# Altium PCB PCB2.PcbDoc
Units mm, origin at the board's own origin, x right, y up, seen from the top; angles counter-clockwise.
Board outline 127.67 x 40.34 mm, 2 copper layers (Top Layer, Bottom Layer); 5 components, 2 nets, 12 pads, 289 vias.
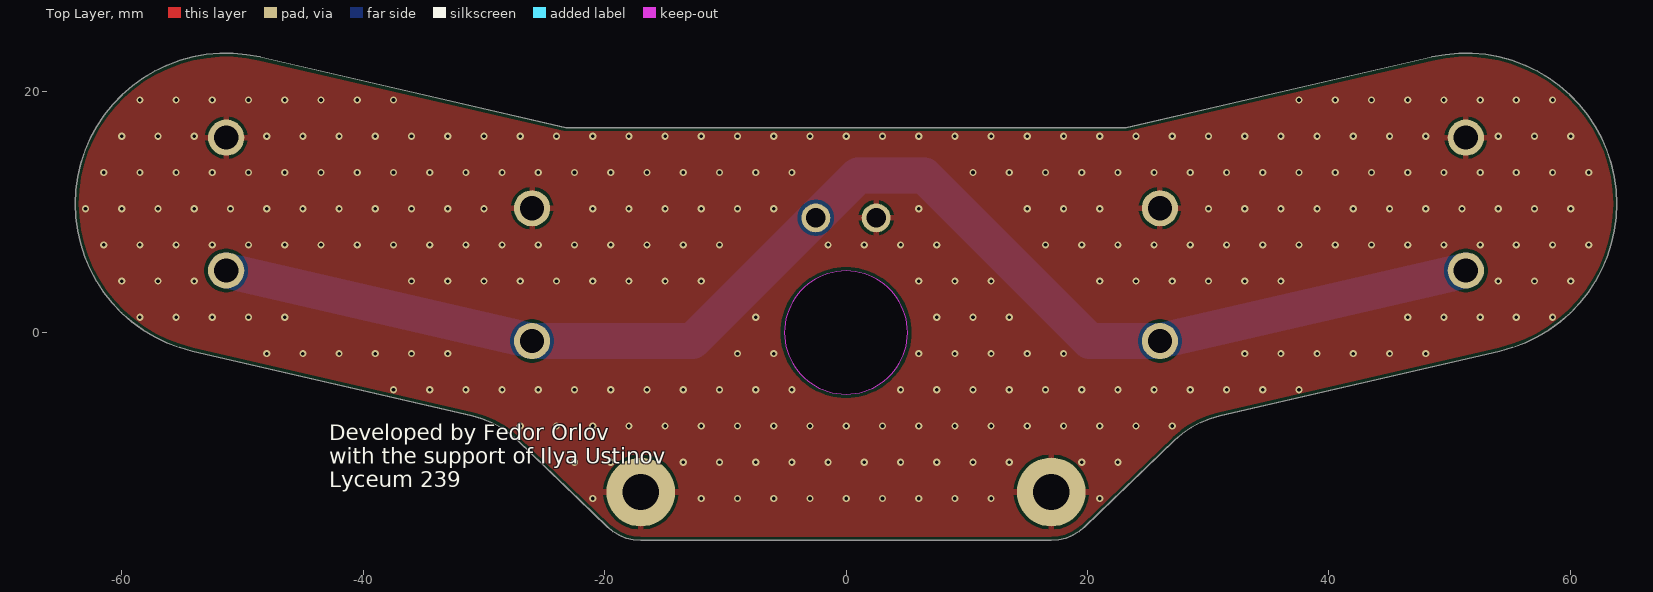
[diagram p0: Top Layer view]
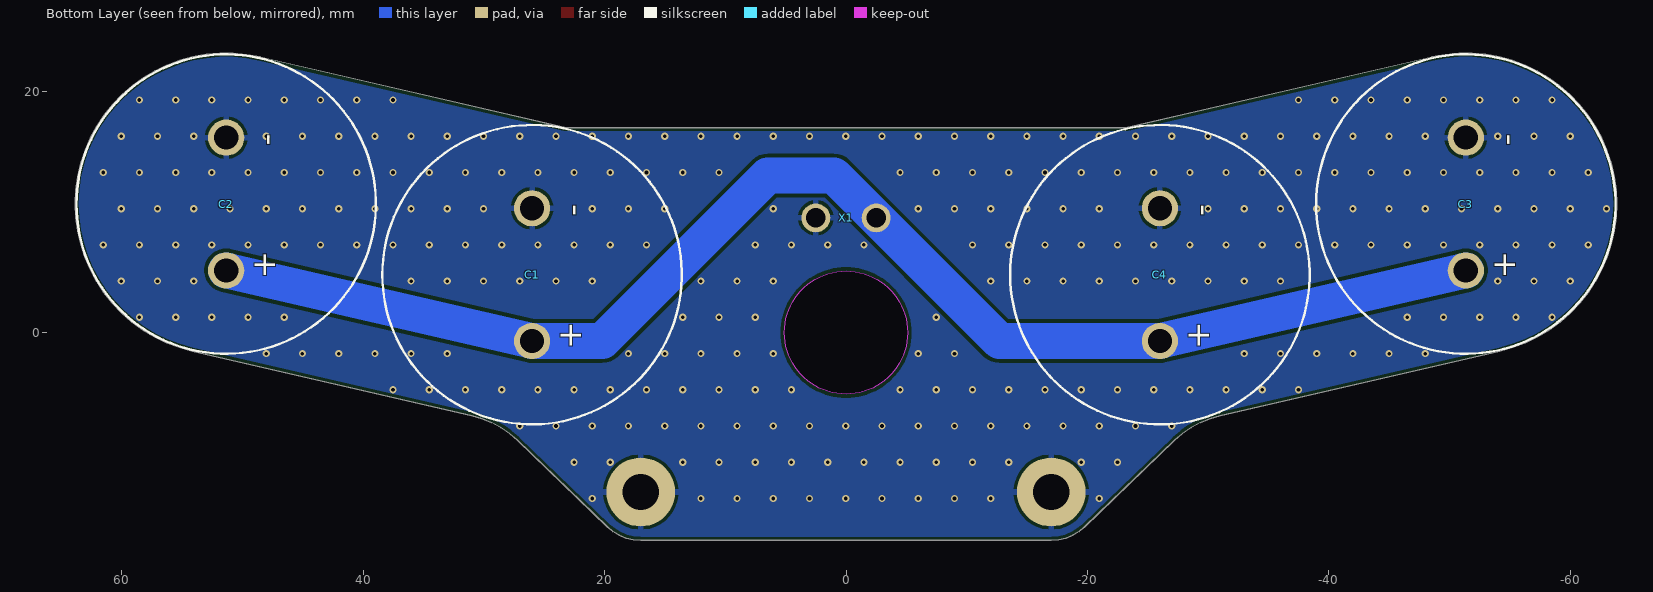
[diagram p1: Bottom Layer view, seen from below]
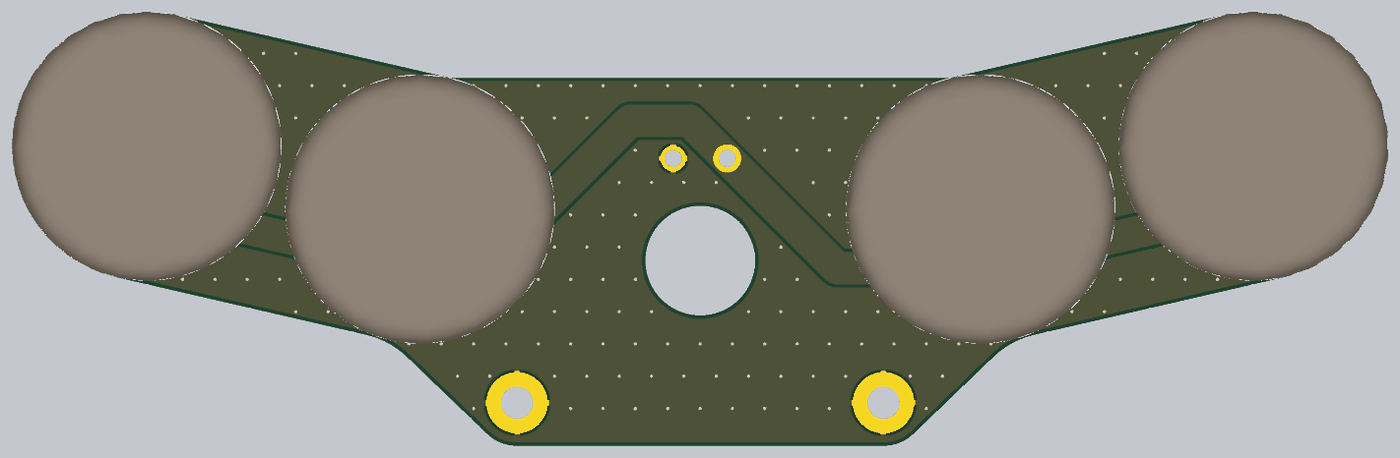
[diagram p2: 3D render of the assembled board from below, using the file's embedded part models]

## Layer stack, top to bottom
Top Solder: solder mask 0.0102, Solder Resist, Dk 3.5
Top Layer: signal copper 0.0356
Dielectric 1: dielectric 0.32, FR-4, Dk 4.8
Bottom Layer: signal copper 0.0356
Bottom Solder: solder mask 0.0102, Solder Resist, Dk 3.5

## Board outline
54.146,-1.537 55.226,-1.236 56.275,-0.839 57.284,-0.35 58.246,0.228 59.152,0.889 59.994,1.629 60.767,2.442 61.465,3.321 62.08,4.258 62.609,5.247 63.047,6.28 63.391,7.347 63.638,8.441 63.786,9.553 63.834,10.674 63.78,11.794 63.627,12.905 63.375,13.998 63.026,15.064 62.582,16.094 62.048,17.081 61.428,18.015 60.726,18.89 59.949,19.699 59.103,20.435 58.194,21.092 57.23,21.665 56.218,22.149 55.167,22.541 54.085,22.836 52.981,23.034 51.863,23.132 50.742,23.129 49.625,23.025 48.522,22.822 23.188,16.974 -23.188,16.974 -48.522,22.822 -49.625,23.025 -50.742,23.129 -51.863,23.132 -52.981,23.034 -54.085,22.836 -55.167,22.541 -56.218,22.149 -57.23,21.665 -58.194,21.092 -59.103,20.435 -59.949,19.699 -60.726,18.89 -61.428,18.015 -62.048,17.081 -62.582,16.094 -63.026,15.064 -63.375,13.998 -63.627,12.905 -63.78,11.794 -63.834,10.674 -63.786,9.553 -63.638,8.441 -63.391,7.347 -63.047,6.28 -62.609,5.247 -62.08,4.258 -61.465,3.321 -60.767,2.442 -59.994,1.629 -59.152,0.889 -58.246,0.228 -57.284,-0.35 -56.275,-0.839 -55.226,-1.236 -54.146,-1.537 -30.967,-6.888 -30.138,-7.127 -29.34,-7.454 -28.581,-7.865 -27.871,-8.356 -27.218,-8.92 -19.774,-16.087 -19.302,-16.477 -18.775,-16.79 -18.207,-17.019 -17.611,-17.159 -17,-17.206 17,-17.206 17.611,-17.159 18.207,-17.019 18.775,-16.79 19.302,-16.477 19.774,-16.087 27.218,-8.92 27.871,-8.356 28.581,-7.865 29.34,-7.454 30.138,-7.127 30.967,-6.888
cut-out: -5.099,0 ccw(c0,0) 0,-5.099 ccw(c0,0) 5.099,0 ccw(c0,0) 0,5.099 ccw(c0,0)

## Design rules (kind name [scope] priority, off if disabled: settings)
BoardOutlineClearance [All] p1: gap=0.3 ignorepadtopadclearanceinfootprint=FALSE
Clearance Clearance_Polygon [InPolygon] p1: gap=0.3 ignorepadtopadclearanceinfootprint=FALSE
Clearance [All] p2: gap=0.127 ignorepadtopadclearanceinfootprint=FALSE
ComponentClearance [All] p1: gap=0 collisioncheckmode=3 verticalgap=2540 showdistances=FALSE
Height [All] p1: minheight=0 maxheight=50 prefheight=12.7
PolygonConnect [All] p1: thpad.connectstyle=Relief thpad.reliefconductorwidth=0.5 thpad.reliefentries=4 thpad.polygonreliefangle="90 Angle" thpad.airgapwidth=0.254 smdpad.connectstyle=Relief smdpad.reliefconductorwidth=0.5 smdpad.reliefentries=4 smdpad.polygonreliefangle="90 Angle" smdpad.airgapwidth=0.254 via.connectstyle=Direct via.reliefconductorwidth=0.5 via.reliefentries=4 via.polygonreliefangle="90 Angle" via.airgapwidth=0.254
RoutingVias [All] p1: holewidth=0.3 width=0.6 viastyle="Through Hole" minholewidth=0.3 minwidth=0.5 maxholewidth=2.5 maxwidth=3
SolderMaskExpansion [All] p1: expansion=0.102 istentingtop=FALSE
Width [All] p1: maxlimit=5 minlimit=0.127 preferedwidth=0.5 minimp=50.000000 maximp=50.000000 favimp=50.000000
28 further rules are at their usual default settings.

## Classes and differential pairs
component class Sheet2: X1

## Components (designator, comment, footprint, x,y, rotation, side; value= is the part's Value field where it differs from the comment)
C1 "" "Cap R25 L40" 26,4.794 r90 bottom locked
C2 "" "Cap R25 L40" 51.334,10.643 r90 bottom locked
C3 "" "Cap R25 L40" -51.334,10.643 r90 bottom locked
C4 "" "Cap R25 L40" -26,4.794 r90 bottom locked
X1 "" Contact_16AWG 0,9.5 r0 bottom

## Footprints (in the part's own frame and the unit in brackets; to place one, negate y for a bottom-side part, rotate by r counter-clockwise, add the part's x,y. Pads: shape width x height; smd on the part's side, far side on the other; paste and mask are expansions set on the pad)
"Cap R25 L40" [mm]
  round 3 hole 2: 1(-5.5,0) 2(5.5,0)
  silkscreen extent -12.4,-12.4 12.4,12.4, body extent -12.5,-12.5 12.5,12.5, height 40
Contact_16AWG [mm]
  round 2.4 hole 1.6: 1(-2.5,0) 2(2.5,0)

## Part data
C1 C2 C3 C4: library part "Capacitor electrolytic", "Конденсатор пол."
X1: library part Header_2_plg, "Разъем - 2 конт. вилка", Contact_1=+, Contact_2=-

## Free pads (board coordinates)
  round 5.7 hole 3: 1(-17,-13.206) 1(17,-13.206)

## Via types
v1: diameter 0.6, hole 0.3, Top Layer to Bottom Layer, tented both sides, 289 vias

## Nets (pads, with @x,y where several pads share a name; then routed paths per layer and width w, separated by ;. In a path a pad name is that pad's centre, name@x,y a point inside that pad or via, vN(x,y) a via of type N, cw(c..) or ccw(c..) an arc to the next point about the centre after c; other vN are vias at no path point)
NetC1_1: C1.1 C2.1 C3.1 C4.1 X1.1 | length 115.4
  Bottom Layer w3: C3.1 C4.1 -12.706,-0.706 1,13 6.475,13 20.181,-0.706 C1.1 C2.1
NetC1_2: C1.2 C2.2 C3.2 C4.2 pad.1 X1.2
  other v1: -20.981,-13.74 -11.981,-13.74 -8.981,-13.74 -5.981,-13.74 -2.981,-13.74 0.019,-13.74 3.019,-13.74 6.019,-13.74 9.019,-13.74 12.019,-13.74 21.019,-13.74 -22.481,-10.74 -19.481,-10.74 -13.481,-10.74 -10.481,-10.74 -7.481,-10.74 -4.481,-10.74 -1.481,-10.74 1.519,-10.74 4.519,-10.74 7.519,-10.74 10.519,-10.74 13.519,-10.74 19.519,-10.74 22.519,-10.74 -26.981,-7.74 -23.981,-7.74 -20.981,-7.74 -17.981,-7.74 -14.981,-7.74 -11.981,-7.74 -8.981,-7.74 -5.981,-7.74 -2.981,-7.74 0.019,-7.74 3.019,-7.74 6.019,-7.74 9.019,-7.74 12.019,-7.74 15.019,-7.74 18.019,-7.74 21.019,-7.74 24.019,-7.74 27.019,-7.74 -37.481,-4.74 -34.481,-4.74 -31.481,-4.74 -28.481,-4.74 -25.481,-4.74 -22.481,-4.74 -19.481,-4.74 -16.481,-4.74 -13.481,-4.74 -10.481,-4.74 -7.481,-4.74 -4.481,-4.74 4.519,-4.74 7.519,-4.74 10.519,-4.74 13.519,-4.74 16.519,-4.74 19.519,-4.74 22.519,-4.74 25.519,-4.74 28.519,-4.74 31.519,-4.74 34.519,-4.74 37.519,-4.74 -47.981,-1.74 -44.981,-1.74 -41.981,-1.74 -38.981,-1.74 -35.981,-1.74 -32.981,-1.74 -8.981,-1.74 -5.981,-1.74 6.019,-1.74 9.019,-1.74 12.019,-1.74 15.019,-1.74 18.019,-1.74 33.019,-1.74 36.019,-1.74 39.019,-1.74 42.019,-1.74 45.019,-1.74 48.019,-1.74 -58.481,1.26 -55.481,1.26 -52.481,1.26 -49.481,1.26 -46.481,1.26 -7.481,1.26 7.519,1.26 10.519,1.26 13.519,1.26 46.519,1.26 49.519,1.26 52.519,1.26 55.519,1.26 58.519,1.26 -59.981,4.26 -56.981,4.26 -53.981,4.26 -35.981,4.26 -32.981,4.26 -29.981,4.26 -26.981,4.26 -23.981,4.26 -20.981,4.26 -17.981,4.26 -14.981,4.26 -11.981,4.26 6.019,4.26 9.019,4.26 12.019,4.26 21.019,4.26 24.019,4.26 27.019,4.26 30.019,4.26 33.019,4.26 36.019,4.26 54.019,4.26 57.019,4.26 60.019,4.26 -61.481,7.26 -58.481,7.26 -55.481,7.26 -52.481,7.26 -49.481,7.26 -46.481,7.26 -43.481,7.26 -40.481,7.26 -37.481,7.26 -34.481,7.26 -31.481,7.26 -28.481,7.26 -25.481,7.26 -22.481,7.26 -19.481,7.26 -16.481,7.26 -13.481,7.26 -10.481,7.26 -1.481,7.26 1.519,7.26 4.519,7.26 7.519,7.26 16.519,7.26 19.519,7.26 22.519,7.26 25.519,7.26 28.519,7.26 31.519,7.26 34.519,7.26 37.519,7.26 40.519,7.26 43.519,7.26 46.519,7.26 49.519,7.26 52.519,7.26 55.519,7.26 58.519,7.26 61.519,7.26 -62.981,10.26 -59.981,10.26 -56.981,10.26 -53.981,10.26 -50.981,10.26 -47.981,10.26 -44.981,10.26 -41.981,10.26 -38.981,10.26 -35.981,10.26 -32.981,10.26 -29.981,10.26 -20.981,10.26 -17.981,10.26 -14.981,10.26 -11.981,10.26 -8.981,10.26 -5.981,10.26 6.019,10.26 15.019,10.26 18.019,10.26 21.019,10.26 30.019,10.26 33.019,10.26 36.019,10.26 39.019,10.26 42.019,10.26 45.019,10.26 48.019,10.26 51.019,10.26 54.019,10.26 57.019,10.26 60.019,10.26 -61.481,13.26 -58.481,13.26 -55.481,13.26 -52.481,13.26 -49.481,13.26 -46.481,13.26 -43.481,13.26 -40.481,13.26 -37.481,13.26 -34.481,13.26 -31.481,13.26 -28.481,13.26 -25.481,13.26 -22.481,13.26 -19.481,13.26 -16.481,13.26 -13.481,13.26 -10.481,13.26 -7.481,13.26 -4.481,13.26 10.519,13.26 13.519,13.26 16.519,13.26 19.519,13.26 22.519,13.26 25.519,13.26 28.519,13.26 31.519,13.26 34.519,13.26 37.519,13.26 40.519,13.26 43.519,13.26 46.519,13.26 49.519,13.26 52.519,13.26 55.519,13.26 58.519,13.26 61.519,13.26 -59.981,16.26 -56.981,16.26 -53.981,16.26 -47.981,16.26 -44.981,16.26 -41.981,16.26 -38.981,16.26 -35.981,16.26 -32.981,16.26 -29.981,16.26 -26.981,16.26 -23.981,16.26 -20.981,16.26 -17.981,16.26 -14.981,16.26 -11.981,16.26 -8.981,16.26 -5.981,16.26 -2.981,16.26 0.019,16.26 3.019,16.26 6.019,16.26 9.019,16.26 12.019,16.26 15.019,16.26 18.019,16.26 21.019,16.26 24.019,16.26 27.019,16.26 30.019,16.26 33.019,16.26 36.019,16.26 39.019,16.26 42.019,16.26 45.019,16.26 48.019,16.26 54.019,16.26 57.019,16.26 60.019,16.26 -58.481,19.26 -55.481,19.26 -52.481,19.26 -49.481,19.26 -46.481,19.26 -43.481,19.26 -40.481,19.26 -37.481,19.26 37.519,19.26 40.519,19.26 43.519,19.26 46.519,19.26 49.519,19.26 52.519,19.26 55.519,19.26 58.519,19.26

## Polygon pours and split planes (outlines as drawn)
NetC1_2 on Bottom Layer "NETC1_2_L02_P001" (solid, pour order 1): 54.146,-1.537 55.226,-1.236 56.275,-0.839 57.284,-0.35 58.246,0.228 59.152,0.889 59.994,1.629 60.767,2.442 61.465,3.321 62.08,4.258 62.609,5.247 63.047,6.28 63.391,7.347 63.638,8.441 63.786,9.553 63.834,10.674 63.78,11.794 63.627,12.905 63.375,13.998 63.026,15.064 62.582,16.094 62.048,17.081 61.428,18.015 60.726,18.89 59.949,19.699 59.103,20.435 58.194,21.092 57.23,21.665 56.218,22.149 55.167,22.541 54.085,22.836 52.981,23.034 51.863,23.132 50.742,23.129 49.625,23.025 48.522,22.822 23.188,16.974 -23.188,16.974 -48.522,22.822 -49.625,23.025 -50.742,23.129 -51.863,23.132 -52.981,23.034 -54.085,22.836 -55.167,22.541 -56.218,22.149 -57.23,21.665 -58.194,21.092 -59.103,20.435 -59.949,19.699 -60.726,18.89 -61.428,18.015 -62.048,17.081 -62.582,16.094 -63.026,15.064 -63.375,13.998 -63.627,12.905 -63.78,11.794 -63.834,10.674 -63.786,9.553 -63.638,8.441 -63.391,7.347 -63.047,6.28 -62.609,5.247 -62.08,4.258 -61.465,3.321 -60.767,2.442 -59.994,1.629 -59.152,0.889 -58.246,0.228 -57.284,-0.35 -56.275,-0.839 -55.226,-1.236 -54.146,-1.537 -30.967,-6.888 -30.138,-7.127 -29.34,-7.454 -28.581,-7.865 -27.871,-8.356 -27.218,-8.92 -19.774,-16.087 -19.302,-16.477 -18.775,-16.79 -18.207,-17.019 -17.611,-17.159 -17,-17.206 17,-17.206 17.611,-17.159 18.207,-17.019 18.775,-16.79 19.302,-16.477 19.774,-16.087 27.218,-8.92 27.871,-8.356 28.581,-7.865 29.34,-7.454 30.138,-7.127 30.967,-6.888
NetC1_2 on Top Layer "NETC1_2_L01_P002" (solid, pour order 2): 54.146,-1.537 55.226,-1.236 56.275,-0.839 57.284,-0.35 58.246,0.228 59.152,0.889 59.994,1.629 60.767,2.442 61.465,3.321 62.08,4.258 62.609,5.247 63.047,6.28 63.391,7.347 63.638,8.441 63.786,9.553 63.834,10.674 63.78,11.794 63.627,12.905 63.375,13.998 63.026,15.064 62.582,16.094 62.048,17.081 61.428,18.015 60.726,18.89 59.949,19.699 59.103,20.435 58.194,21.092 57.23,21.665 56.218,22.149 55.167,22.541 54.085,22.836 52.981,23.034 51.863,23.132 50.742,23.129 49.625,23.025 48.522,22.822 23.188,16.974 -23.188,16.974 -48.522,22.822 -49.625,23.025 -50.742,23.129 -51.863,23.132 -52.981,23.034 -54.085,22.836 -55.167,22.541 -56.218,22.149 -57.23,21.665 -58.194,21.092 -59.103,20.435 -59.949,19.699 -60.726,18.89 -61.428,18.015 -62.048,17.081 -62.582,16.094 -63.026,15.064 -63.375,13.998 -63.627,12.905 -63.78,11.794 -63.834,10.674 -63.786,9.553 -63.638,8.441 -63.391,7.347 -63.047,6.28 -62.609,5.247 -62.08,4.258 -61.465,3.321 -60.767,2.442 -59.994,1.629 -59.152,0.889 -58.246,0.228 -57.284,-0.35 -56.275,-0.839 -55.226,-1.236 -54.146,-1.537 -30.967,-6.888 -30.138,-7.127 -29.34,-7.454 -28.581,-7.865 -27.871,-8.356 -27.218,-8.92 -19.774,-16.087 -19.302,-16.477 -18.775,-16.79 -18.207,-17.019 -17.611,-17.159 -17,-17.206 17,-17.206 17.611,-17.159 18.207,-17.019 18.775,-16.79 19.302,-16.477 19.774,-16.087 27.218,-8.92 27.871,-8.356 28.581,-7.865 29.34,-7.454 30.138,-7.127 30.967,-6.888

## Silkscreen, mask and mechanical layers (free items; w line width, h text height)
Top Overlay:
  text "Developed by Fedor Orlov / with the support of Ilya Ustinov / Lyceum 239" at -42.785,-12.8 h1.3
Top Solder:
  drawing of 4521 lines, arcs and shapes, not listed

## Text inside footprints (layer, text, board x,y; h text height)
C1: Bottom Overlay "-" at 21.754,9.628 h2 r270; Bottom Overlay "+" at 21.921,-1.372 h2 r270
C2: Bottom Overlay "-" at 47.088,15.477 h2 r270; Bottom Overlay "+" at 47.255,4.477 h2 r270
C3: Bottom Overlay "-" at -55.58,15.477 h2 r270; Bottom Overlay "+" at -55.413,4.477 h2 r270
C4: Bottom Overlay "-" at -30.246,9.628 h2 r270; Bottom Overlay "+" at -30.079,-1.372 h2 r270